# Altium PCB IMX6.PcbDoc (part 3 of 3)
Units mil, origin at the board's own origin, x right, y up, seen from the top; angles counter-clockwise.
Board outline 7950 x 5550 mil, 4 copper layers (Top Layer, GND, VCC, Bottom Layer), stack 30.634 mil thick; 238 components, 318 nets, 1023 pads, 393 vias.
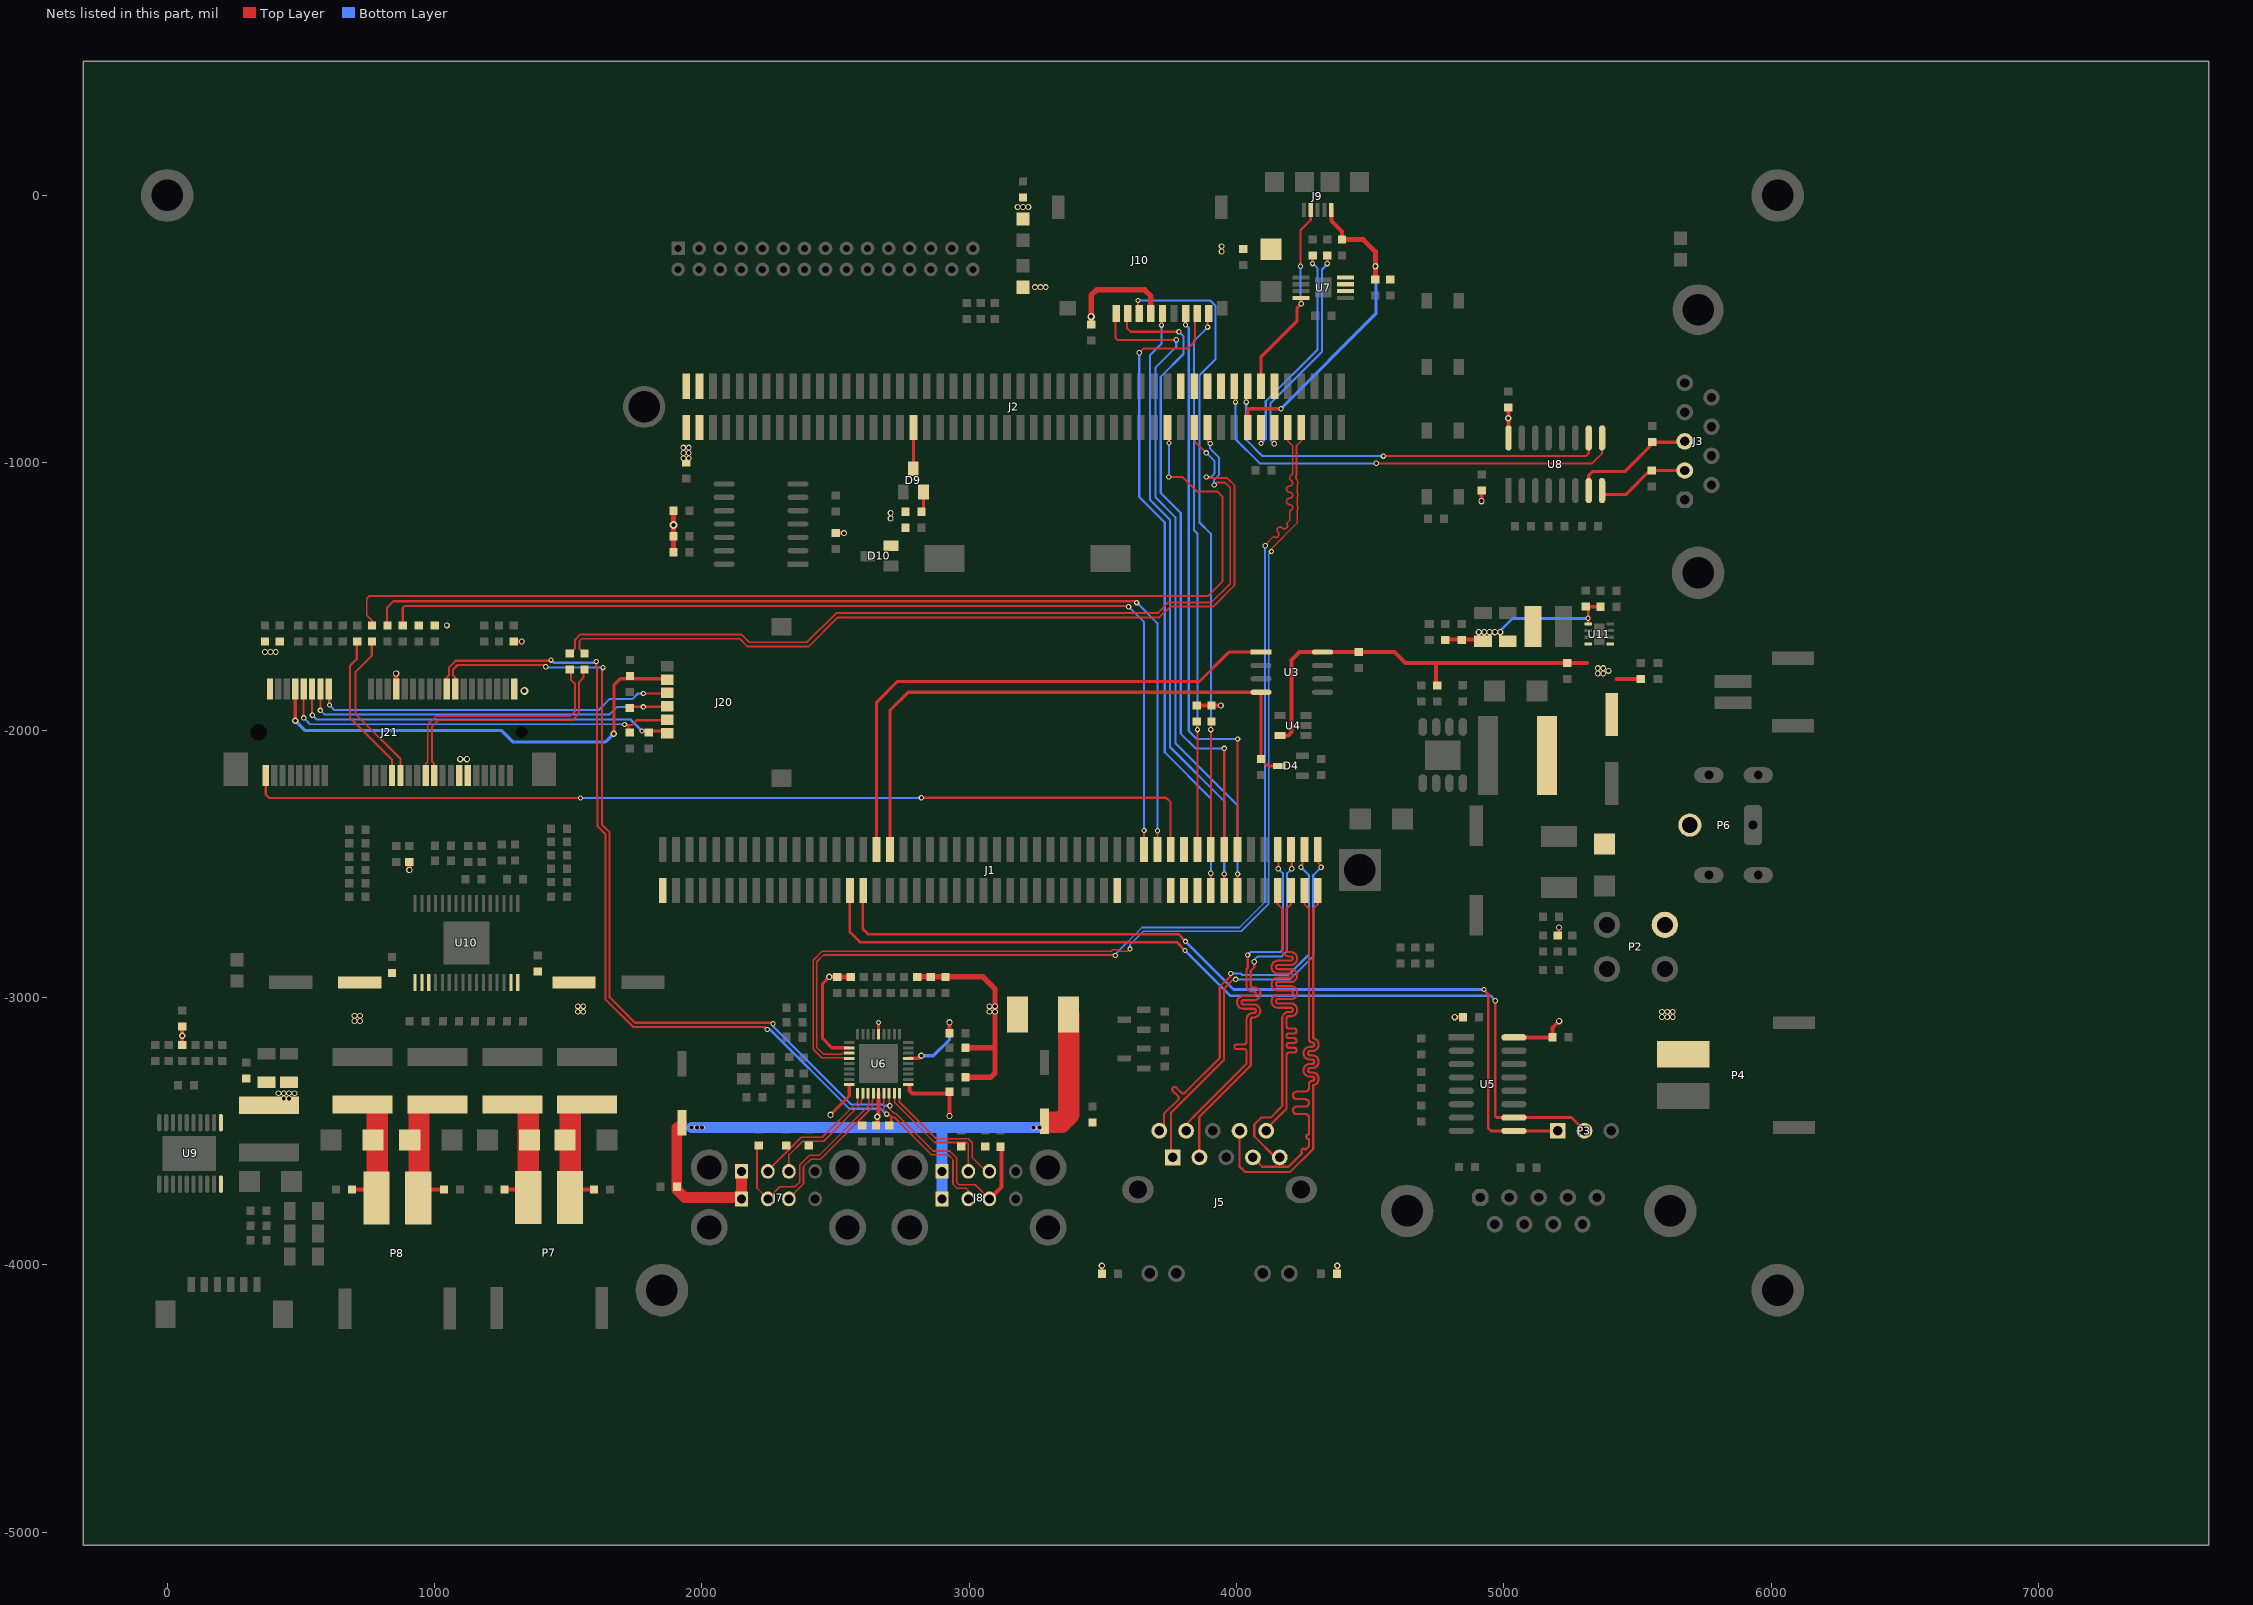
[diagram p5: the nets of this part, all layers, seen from the top]

## Via types
v1: diameter 20, hole 12, Top Layer to Bottom Layer, 140 vias
v2: diameter 24, hole 14, Top Layer to Bottom Layer, 84 vias
v3: diameter 22, hole 14, Top Layer to Bottom Layer, 57 vias
v4: diameter 23, hole 13, Top Layer to Bottom Layer, 38 vias
v5: diameter 22, hole 13, Top Layer to Bottom Layer, 21 vias
v6: diameter 30, hole 22, Top Layer to Bottom Layer, tented top, 15 vias
v7: diameter 22, hole 18, Top Layer to Bottom Layer, 6 vias
v8: diameter 24, hole 13, Top Layer to Bottom Layer, 5 vias
v9: diameter 20, hole 15, Top Layer to Bottom Layer, 5 vias
v10: diameter 18, hole 10, Top Layer to Bottom Layer, 4 vias
v11: diameter 28, hole 16, Top Layer to Bottom Layer, 3 vias
v12: diameter 26, hole 15, Top Layer to Bottom Layer, 3 vias
v13: diameter 22, hole 12, Top Layer to Bottom Layer, 3 vias
v14: diameter 30, hole 15, Top Layer to Bottom Layer, 2 vias
v15: diameter 18, hole 11, Top Layer to Bottom Layer, 2 vias
v16: diameter 28, hole 17, Top Layer to Bottom Layer, 1 vias
v17: diameter 25, hole 15, Top Layer to Bottom Layer, 1 vias
v18: diameter 28, hole 15, Top Layer to Bottom Layer, 1 vias
v19: diameter 18, hole 12, Top Layer to Bottom Layer, 1 vias
v20: diameter 30, hole 16, Top Layer to Bottom Layer, 1 vias

## Nets (pads, with @x,y where several pads share a name; then routed paths per layer and width w, separated by ;. In a path a pad name is that pad's centre, name@x,y a point inside that pad or via, vN(x,y) a via of type N, cw(c..) or ccw(c..) an arc to the next point about the centre after c; other vN are vias at no path point) (continued)
PCIE_RX_P: C117.1 J2.73 | length 4052.9
  Top Layer w7: C117.1@766,-1608 766,-1589 746.5,-1569.5 746.5,-1508 756.5,-1498 3893.63,-1498 3947,-1444.63 3947,-1126.37 3927.63,-1107 3850,-1107 3796,-1053 v1(3746,-1053) ; v1@3747,-927 v1(3747,-926) J2.73@3747,-886
  Bottom Layer w7: v1(3746,-1053) 3746,-1040 3747,-1039 v1(3747,-926)
PCIE_RXO_N: C116.2 J21.23 | length 556
  Top Layer w8: C116.2@709,-1673 709,-1734 684,-1759 684,-1954 841,-2111 J21.23@841,-2152 ; J21.23@841.97,-2169.4 J21.23@842,-2171
PCIE_RXO_P: C117.2 J21.25 | length 577.9
  Top Layer w8: C117.2@765,-1668 765,-1722 704,-1783 704,-1939 873,-2108 J21.25@873,-2149 ; J21.25@872,-2171 J21.25@872.02,-2169.41
PCIE_TX_N: C118.1 J2.79 | length 3293.1
  Top Layer w7: C118.1@1506,-1713 1525.5,-1693.5 1525.5,-1661.37 1544.87,-1642 2147.63,-1642 2176.63,-1671 2393,-1671 2502,-1562 3704.37,-1562 3744.37,-1522 3906,-1522 3976,-1452 3976,-1093 3956,-1073 3926,-1073 v1(3916,-1083) ; J2.79@3891.31,-867.49 3891.31,-918.73 3900.58,-928 v1(3901,-928)
  Bottom Layer w7: v1(3901,-928) 3901,-946.89 3933.84,-979.73 3933.84,-1046.47 3916,-1064.31 v1(3916,-1083)
PCIE_TX_P: C119.1 J2.77 | length 3349.1
  Top Layer w7: C119.1@1561,-1713 1541.5,-1693.5 1541.5,-1668 1551.5,-1658 2141,-1658 2170,-1687 2399.63,-1687 2508.63,-1578 3711,-1578 3751,-1538 3912.63,-1538 3992,-1458.63 3992,-1084 3965,-1057 3890,-1057 v1(3886,-1053) ; J2.77@3841.31,-867.49 3845.31,-871.49 3845.31,-922.31 v1(3886,-963)
  Bottom Layer w7: v1(3886,-1053) 3904.69,-1053 3917.84,-1039.84 3917.84,-994.84 v1(3886,-963)
PCIE_TXO_N: C118.2 J21.31 | length 922.6
  Top Layer w7: J21.31@966.98,-2169.42 966.98,-2126.05 974.73,-2118.3 974.73,-1978.64 1006.37,-1947 1508.37,-1947 1524.69,-1930.69 1524.69,-1825.69 1510,-1811 C118.2@1510,-1778
PCIE_TXO_P: C119.2 J21.33 | length 919.2
  Top Layer w7: J21.33@998.48,-2169.42 998.48,-2126.05 990.73,-2118.3 990.73,-1985.27 1013,-1963 1515,-1963 1540.69,-1937.31 1540.69,-1820.31 1557,-1804 C119.2@1557,-1782
POR_B: D9.3 J2.35 | length 157.5
  Top Layer w12: J2.35@2791.31,-867.49 2791.31,-1018.31 D9.3@2796,-1023
PWM1_OUT: J1.1
RESET_B: D9.2 R93.1 | length 75.3
  Top Layer w12: R93.1@2826,-1183 2828.94,-1180.06 D9.2@2828.94,-1108.95
SATA_RX_N: J2.82
SATA_RX_P: J2.80
SATA_TX_N: J2.76
SATA_TX_P: J2.78
SD2_CD: J1.82 J10.9 R36.1 | length 2061.9
  Top Layer w8: J1.82@3853.52,-2446.23 v1(3853.52,-1998) R36.1@3853.52,-1970.52 ; v1(3891.5,-492.5) J10.9@3891.5,-437.89
  Bottom Layer w8: v1(3853.52,-1998) 3853.52,-1265.52 3841,-1253 3841,-543 v1(3891.5,-492.5)
SD2_CLK: J1.85 J10.5 | length 2295.4
  Top Layer w8: v1(3719,-485) J10.5@3719,-437.17 ; J1.85@3953.52,-2599.77 v1(3953.52,-2538)
  Bottom Layer w8: v1(3719,-485) 3719,-525 3719,-555 3676,-598 3676,-1138 3751,-1213 3751,-2063 3953.52,-2265.52 v1(3953.52,-2538)
SD2_CMD: J1.84 J10.3 R35.1 | length 2447
  Top Layer w8: J10.3@3629,-432.72 3631,-430.72 v1(3631,-393) ; J1.84@3903.52,-2446.23 v1(3903.52,-1998) R35.1@3903.52,-1965.52
  Bottom Layer w8: v1(3631,-393) 3901,-393 3921,-413 3921,-613 3861,-673 3861,-1223 3903.52,-1265.52 v1(3903.52,-1998)
SD2_DATA0: J1.88 J10.7 | length 2180.7
  Top Layer w8: J10.7@3806.14,-436.64 3809,-439.5 v1(3809,-484) ; J1.88@4003.52,-2446.23 v1(4003.52,-2033)
  Bottom Layer w8: v1(3809,-484) 3821,-496 3821,-2003 3851,-2033 v1(4003.52,-2033)
SD2_DATA1: J1.83 J10.8 | length 2438.4
  Top Layer w8: v1(3636,-588) 3651,-573 3816,-573 3844,-545 J10.8@3844,-455 ; J1.83@3903.52,-2599.77 v1(3903.52,-2535.52)
  Bottom Layer w8: v1(3636,-588) 3636,-1128 3731,-1223 3731,-2083 3903.52,-2255.52 v1(3903.52,-2535.52)
SD2_DATA2: J1.87 J10.1 | length 2546
  Top Layer w8: J10.1@3546.3,-436.64 3546.3,-532.3 3554,-540 v1(3774,-540) ; J1.87@4003.52,-2599.77 v1(4003.52,-2538)
  Bottom Layer w8: v1(3774,-540) 3774,-565.87 3696,-643.87 3696,-1128 3771,-1203 3771,-2048 4003.52,-2280.52 v1(4003.52,-2538)
SD2_DATA3: J1.86 J10.2 | length 2399.2
  Top Layer w8: J10.2@3589.61,-436.64 3589.61,-495.61 3604,-510 v1(3784,-510) ; J1.86@3953.52,-2446.23 v1(3953.52,-2068)
  Bottom Layer w8: v1(3784,-510) 3801,-527 3801,-593 3716,-678 3716,-1113 3791,-1188 3791,-2013 3846,-2068 v1(3953.52,-2068)
SD3_CMD: J1.77
SD3_DATA0: J1.80
SD3_DATA1: J1.74 R105.1 | length 3692.2
  Top Layer w8: R105.1@881,-1608 881,-1543 889,-1535 3593,-1535 v1@3600,-1542 ; J1.74@3654,-2415 v1@3654,-2374
  Bottom Layer w8: v1(3596,-1538) 3654,-1596 v1(3654,-2375)
SD3_DATA2: J1.76 R104.1 | length 3799.4
  Top Layer w8: R104.1@822,-1608 822,-1542 846,-1518 v1@3621,-1518 ; J1.76@3704,-2416 v1@3704,-2375
  Bottom Layer w8: v1@3627.5,-1523.5 3703.5,-1599.5 v1@3703.5,-2375.5
  other v1: 3704,-2376 3626,-1523
SD3_DATA4: J1.79
SD3_DATA5: J1.78 J21.1 | length 3615.8
  Top Layer w8: J21.1@368.56,-2182 368.56,-2240.56 381.56,-2253.56 v1(1546,-2253.56) ; J21.1@368.94,-2169.42 J21.1@369,-2163 ; v1(2821,-2253) 3736,-2253 3753,-2270 J1.78@3753,-2424
  Bottom Layer w8: v1(1546,-2253.56) v1@2821,-2253.56
SD3_DATA6: J1.81
SD3_DATA7: J1.69
SPEAK1+: C76.2 D14.K L9.2 P8.1 | length 402
  Top Layer w15: P8.1@974,-3718 C76.2@1036,-3718
  Top Layer w80: P8.1@941.91,-3748 L9.2@941.91,-3408
SPEAK1-: C80.1 D15.K L10.2 P8.2 | length 381
  Top Layer w15: C80.1@691,-3718 P8.2@762,-3718
  Top Layer w80: P8.2@786,-3718 L10.2@786,-3408
SPEAK2+: C70.2 D12.K L7.2 P7.1 | length 372
  Top Layer w15: P7.1@1534,-3718 C70.2@1596,-3718
  Top Layer w80: P7.1@1506.91,-3718 L7.2@1506.91,-3408
SPEAK2-: C72.1 D13.K L8.2 P7.2 | length 368
  Top Layer w15: C72.1@1261,-3718 P7.2@1324,-3718
  Top Layer w80: P7.2@1351,-3718 L8.2@1351,-3413
TRX0_N: J1.100 J5.2 | length 1505.7
  Top Layer w8: J5.2@3754,-3591 3754,-3431.63 3953,-3232.63 3953,-2966.81 3987.81,-2932 v1(3997,-2932) ; J1.100@4306.82,-2446.23 4306.82,-2497.52 4316,-2506.7 v1(4316,-2513)
  Bottom Layer w8: v1(3997,-2932) 4200.13,-2932 4286.5,-2845.63 4286.5,-2542.5 v1(4316,-2513)
TRX0_P: J1.98 J5.1 | length 1456.8
  Top Layer w8: J5.1@3728,-3498 3728,-3435 3781,-3382 ccw(c3774.64,-3375.64) 3781,-3369.27 3761.82,-3350.09 cw(c3768.18,-3343.73) 3761.82,-3337.36 cw(c3768.18,-3343.73) 3774.55,-3337.36 3793.73,-3356.54 ccw(c3800.09,-3350.18) 3806.46,-3356.54 3812,-3351 3937,-3226 3937,-2960.19 3978,-2919.19 v1(3978,-2910) ; v1(4241,-2513) 4241,-2507.68 4246.94,-2501.74 J1.98@4246.94,-2491.42
  Bottom Layer w8: v1(3978,-2910) 4015,-2910 4021,-2916 4193.5,-2916 4270.5,-2839 4270.5,-2542.5 v1(4241,-2513) v1@4240.1,-2513.9
TRX1_N: J1.96 J5.4 | length 1506.9
  Top Layer w8: J5.4@3861,-3598 3860,-3597 3860,-3447 4053,-3254 4053,-3082 cw(c4061,-3082) 4061,-3074 4064.47,-3074 ccw(c4064.47,-3050) 4088.47,-3050 ccw(c4064.47,-3050) 4064.47,-3026 4025.53,-3026 cw(c4025.53,-3018) 4025.53,-3010 4064.47,-3010 ccw(c4064.47,-2986) 4088.47,-2986 ccw(c4064.47,-2986) 4064.47,-2962 4061,-2962 cw(c4061,-2954) 4053,-2954 4053,-2900 4066,-2887 v1(4066,-2866) ; J1.96@4203.52,-2446.23 4206,-2448.71 v1(4206,-2518)
  Bottom Layer w8: v1(4066,-2866) 4066,-2859 4079,-2846 4168.63,-2846 4189,-2825.63 4189,-2535 v1(4206,-2518)
TRX1_P: J1.94 J5.3 | length 1510
  Top Layer w8: J5.3@3811,-3498 3811,-3473.37 3848.69,-3435.69 4022.19,-3262.19 4030.64,-3253.74 4037,-3247.37 4037,-3202 ccw(c4028,-3202) 4028,-3193 4000.59,-3193 cw(c4000.59,-3184) 3991.59,-3184 cw(c4000.59,-3184) 4000.59,-3175 4028,-3175 ccw(c4028,-3166) 4037,-3166 4037,-3157 4037,-3148 4037,-3082 cw(c4061,-3082) 4061,-3058 4064.47,-3058 ccw(c4064.47,-3050) 4072.47,-3050 ccw(c4064.47,-3050) 4064.47,-3042 4025.53,-3042 cw(c4025.53,-3018) 4025.53,-2994 4064.47,-2994 ccw(c4064.47,-2986) 4072.47,-2986 ccw(c4064.47,-2986) 4064.47,-2978 4061,-2978 cw(c4061,-2954) 4037,-2954 4037,-2893.37 4041.69,-2888.69 4041.69,-2841.69 v1(4041,-2841) ; J1.94@4153.52,-2446.23 4156,-2448.71 v1(4156,-2518) v1@4154.05,-2518
  Bottom Layer w8: v1(4041,-2841) 4052,-2830 4162,-2830 4173,-2819 4173,-2535 v1(4156,-2518)
TRX2_N: J1.97 J5.8 | length 1565.5
  Top Layer w8: J5.8@4061,-3598 4096,-3633 4194,-3633 4239,-3588 4244.66,-3582.34 ccw(c4243.95,-3581.64) 4244.66,-3580.93 cw(c4251.02,-3574.57) 4244.66,-3568.2 cw(c4251.02,-3574.57) 4257.38,-3568.2 ccw(c4258.09,-3567.49) 4258.8,-3568.2 4270.52,-3556.48 4270.52,-3547.48 4270.52,-3530.48 ccw(c4269.52,-3530.48) 4269.52,-3529.48 cw(c4269.52,-3520.48) 4260.52,-3520.48 cw(c4269.52,-3520.48) 4269.52,-3511.48 ccw(c4269.52,-3510.48) 4270.52,-3510.48 4270.52,-3486 4270.52,-3450 ccw(c4256.52,-3450) 4256.52,-3436 4224.52,-3436 cw(c4224.52,-3422) 4210.52,-3422 cw(c4224.52,-3422) 4224.52,-3408 4256.52,-3408 ccw(c4256.52,-3394) 4270.52,-3394 ccw(c4256.52,-3394) 4256.52,-3380 4224.52,-3380 cw(c4224.52,-3366) 4210.52,-3366 cw(c4224.52,-3366) 4224.52,-3352 4256.52,-3352 ccw(c4256.52,-3338) 4270.52,-3338 4270.52,-3337 4270.52,-3324 cw(c4282.52,-3324) 4282.52,-3312 ccw(c4282.52,-3304) 4290.52,-3304 ccw(c4282.52,-3304) 4282.52,-3296 4274.52,-3296 cw(c4274.52,-3272) 4274.52,-3248 4282.52,-3248 ccw(c4282.52,-3240) 4290.52,-3240 ccw(c4282.52,-3240) 4282.52,-3232 4274.52,-3232 cw(c4274.52,-3208) 4274.52,-3184 4282.52,-3184 ccw(c4282.52,-3176) 4290.52,-3176 ccw(c4282.52,-3176) 4282.52,-3168 cw(c4282.52,-3156) 4270.52,-3156 4270.52,-2800.6 ; J1.97@4253.52,-2599.77 4253.52,-2651.02 4270.52,-2668.02 4270.52,-2804
TRX2_P: J1.99 J5.7 | length 1549.5
  Top Layer w8: J5.7@4011,-3504 4011,-3632 4031,-3652 4201,-3652 4286.52,-3566.48 4286.52,-3327.66 ccw(c4282.52,-3304) 4306.52,-3304 ccw(c4282.52,-3304) 4282.52,-3280 4274.52,-3280 cw(c4274.52,-3272) 4274.52,-3264 4282.52,-3264 ccw(c4282.52,-3240) 4306.52,-3240 ccw(c4282.52,-3240) 4282.52,-3216 4274.52,-3216 cw(c4274.52,-3208) 4274.52,-3200 4282.52,-3200 ccw(c4282.52,-3176) 4306.52,-3176 ccw(c4282.52,-3176) 4286.52,-3152.34 4286.52,-2800.6 ; 4286.52,-2804 4286.52,-2668.02 4303.52,-2651.02 J1.99@4303.52,-2599.77
TRX3_N: J1.93 J5.10 | length 1558.3
  Top Layer w8: J5.10@4147,-3600 4066,-3519 4066,-3475 4092,-3449 4127,-3449 4170.52,-3405.48 4170.52,-3078 cw(c4194.52,-3078) 4194.52,-3054 4202.41,-3054 ccw(c4202.41,-3046) 4210.41,-3046 ccw(c4202.41,-3046) 4202.41,-3038 4154.63,-3038 cw(c4154.63,-3014) 4154.63,-2990 4202.41,-2990 ccw(c4202.41,-2982) 4210.41,-2982 ccw(c4202.41,-2982) 4202.41,-2974 4154.63,-2974 cw(c4154.63,-2950) 4154.63,-2926 4202.41,-2926 ccw(c4202.41,-2918) 4210.41,-2918 ccw(c4202.41,-2918) 4202.41,-2910 4154.63,-2910 cw(c4154.63,-2886) 4154.63,-2862 4202.41,-2862 ccw(c4202.41,-2854) 4210.41,-2854 ccw(c4202.41,-2854) 4202.41,-2846 4194.52,-2846 cw(c4194.52,-2822) 4170.52,-2822 4170.52,-2668.02 4153.52,-2651.02 J1.93@4153.52,-2599.77
  Bottom Layer w8: J5.10@4161,-3598 J5.10@4166,-3598
TRX3_P: J1.95 J5.9 | length 1564.3
  Top Layer w8: J5.9@4108,-3494 4186.52,-3415.48 4186.52,-3276 4186.52,-3215 cw(c4195.52,-3215) 4195.52,-3206 4215.32,-3206 ccw(c4215.32,-3197) 4224.32,-3197 ccw(c4215.32,-3197) 4215.32,-3188 4195.52,-3188 cw(c4195.52,-3179) 4186.52,-3179 cw(c4195.52,-3179) 4195.52,-3170 4215.32,-3170 ccw(c4215.32,-3161) 4224.32,-3161 ccw(c4215.32,-3161) 4215.32,-3152 4195.52,-3152 cw(c4195.52,-3143) 4186.52,-3143 cw(c4195.52,-3143) 4195.52,-3134 4215.32,-3134 ccw(c4215.32,-3125) 4224.32,-3125 ccw(c4215.32,-3125) 4215.32,-3116 4195.52,-3116 cw(c4195.52,-3107) 4186.52,-3107 4186.52,-3078 cw(c4194.52,-3078) 4194.52,-3070 4202.41,-3070 ccw(c4202.41,-3046) 4226.41,-3046 ccw(c4202.41,-3046) 4202.41,-3022 4154.63,-3022 cw(c4154.63,-3014) 4154.63,-3006 4202.41,-3006 ccw(c4202.41,-2982) 4226.41,-2982 ccw(c4202.41,-2982) 4202.41,-2958 4154.63,-2958 cw(c4154.63,-2950) 4154.63,-2942 4202.41,-2942 ccw(c4202.41,-2918) 4226.41,-2918 ccw(c4202.41,-2918) 4202.41,-2894 4154.63,-2894 cw(c4154.63,-2886) 4154.63,-2878 4202.41,-2878 ccw(c4202.41,-2854) 4226.41,-2854 ccw(c4202.41,-2854) 4202.41,-2830 4194.52,-2830 cw(c4194.52,-2822) 4186.52,-2822 4186.52,-2668.02 4203.52,-2651.02 J1.95@4203.52,-2599.77
  Bottom Layer w8: J5.9@4111,-3499.47 J5.9@4111,-3498
U2_RXD: D18.1 J3.2 U8.8 | length 347.3
  Top Layer w12: U8.8@5366,-1118.83 5455.17,-1118.83 5545.17,-1028.83 J3.2@5676,-1028.83
U2_TXD: D19.1 J3.3 U8.7 | length 462.2
  Top Layer w12: U8.7@5316.91,-1103.76 5316.91,-1047.09 5331,-1033 5451,-1033 5561,-923 J3.3@5671,-923
UART1_RX: J2.84 U8.9 | length 1676.4
  Top Layer w8: J2.84@3991.31,-713.94 3996,-718.63 v1(3996,-773) ; v1(4522,-1002) 5329.61,-1002 5366.91,-964.7 U8.9@5366.91,-906.91
  Bottom Layer w8: v1@3996,-778 3996,-912 4086,-1002 v1(4522,-1002)
UART1_TX: J2.86 U8.10 | length 1565.5
  Top Layer w8: v1(4036,-773) 4036,-719.26 J2.86@4041.31,-713.94 ; v1(4549,-975) 5306.61,-975 5316.91,-964.7 U8.10@5316.91,-906.91
  Bottom Layer w8: v1@4036,-778 4036,-914 4097,-975 v1(4549,-975)
UART2_RX: J1.31 P3.1 U5.9 | length 3294.3
  Top Layer w10: J1.31@2601.52,-2599.77 2601.52,-2743.52 2621,-2763 3782,-2763 v1(3809,-2790) ; v1@4925,-2971 4941,-2987 4941,-3488 4951.91,-3498.91 U5.9@5037.09,-3498.91 ; U5.9@5072.09,-3498.91 P3.1@5188.09,-3498.91
  Bottom Layer w10: v1(3809,-2790) 3989,-2970 v1@4918,-2970
  other v1: 4925,-2970
UART2_TX: J1.29 P3.2 U5.10 | length 3427.7
  Top Layer w10: J1.29@2553.52,-2599.48 2553.52,-2755.52 2591,-2793 3776,-2793 v1(3807,-2824) ; v1@4966.91,-3013 4966.91,-3443.91 4971.91,-3448.91 U5.10@5037.09,-3448.91 ; U5.10@5072.09,-3448.91 5251.91,-3448.91 P3.2@5301,-3498
  Bottom Layer w10: v1(3807,-2824) 3976,-2993 4949,-2993 v1@4967,-3011
  other v1: 4967,-3012
UART3_RX: J1.34 U3.1 | length 2055.9
  Top Layer w12: J1.34@2653.52,-2446.23 2653.52,-1895.48 2731,-1818 3861,-1818 3971,-1708 U3.1@4081,-1708
UART3_TX: D4.3 J1.36 R18.2 U3.4 | length 2265.9
  Top Layer w10: U3.4@4091,-1858 R18.2@4091,-2108 4117.06,-2134.06 D4.3@4159.95,-2134.06
  Top Layer w12: J1.36@2703.52,-2446.23 2703.52,-1925.48 2771,-1858 U3.4@4091,-1858
UIM_CLK: D31.1 J20.6 J21.12 | length 1469
  Top Layer w8: v1@542,-1946 J21.12@542,-1831.36 ; J20.6@1865.44,-2003 J20.6@1870.44,-2008
  Top Layer w10: v1(1776,-2003) J20.6@1865.44,-2003
  Bottom Layer w8: v1@543,-1943 560,-1960 1733,-1960 v1(1776,-2003)
  other v1: 543,-1944
UIM_DATA: D30.2 J20.5 J21.10 | length 1496.7
  Top Layer w8: v1@510,-1957 J21.10@510,-1861.36 ; J21.10@510.02,-1846.58 J21.10@510,-1843 ; v1@1711.17,-1980.17 1738.83,-1980.17 1756,-1963 J20.5@1864,-1963 ; D30.2@1725.09,-2007.91 1725.09,-1981.08
  Bottom Layer w8: v1(511,-1954) 534.25,-1977.29 v1@1712,-1978.37
  other v1: 1711,-1979
UIM_PWR: C1.1 J20.2 J21.8 | length 1753.1
  Top Layer w8: J21.8@477,-1840 J21.8@477.23,-1846.64
  Top Layer w12: v8@479,-1966 J21.8@479,-1842 ; v8@1671,-2005 1671,-1832 1695,-1808 J20.2@1870.44,-1808
  Bottom Layer w12: v8(479,-1965) 515,-2001 1249,-2001 1292,-2044 1639.72,-2044 v8@1672.72,-2011
  other v8: 1671,-2013
UIM_RESET: D32.1 J20.4 J21.14 | length 1470.2
  Top Layer w8: v1@573,-1928 J21.14@573,-1824.36
  Top Layer w10: D32.1@1730.09,-1913 J20.4@1874,-1913
  Bottom Layer w8: v1(573,-1926) 589,-1942 1654,-1942 1683,-1913 v1@1777,-1913
  other v1: 1781,-1913
UIM_VPP: J20.3 J21.16 | length 1356.8
  Top Layer w8: v1@606,-1906 J21.16@606,-1825.36 ; v1(1781,-1863) J20.3@1860,-1863
  Bottom Layer w8: v1@608,-1907 626,-1925 1613,-1925 1655,-1883 1741,-1883 1761,-1863 v1@1772,-1863
  other v1: 607,-1906
USB_H1_D_N: J2.91 U6.30 | length 4163.3
  Top Layer w6: U6.30@2550.76,-3207.72 2527.08,-3207.72 2523.24,-3211.57 2454.37,-3211.57 2430,-3187.2 2430,-2866.17 2455.17,-2841 3536.69,-2841 3540.34,-2837.34 v1(3546,-2843) ; v1(4107,-1310) 4107,-1309 4106,-1308 4138.21,-1275.79 ccw(c4146.34,-1267.66) 4154.47,-1259.53 cw(c4162.6,-1251.4) 4170.74,-1243.26 ccw(c4178.87,-1235.13) 4187,-1227 4198,-1216 4198,-1179 ccw(c4198,-1167.5) 4198,-1156 cw(c4198,-1144.5) 4198,-1133 ccw(c4198,-1121.5) 4198,-1110 cw(c4198,-1098.5) 4198,-1087 ccw(c4198,-1075.5) 4198,-1064 4198,-1053 4210,-1041 4210,-937.42 4191.31,-918.73 J2.91@4191.31,-867.49
  Bottom Layer w6: v1(3546,-2843) 3546,-2838 3646,-2738 4011,-2738 4106,-2643 v1@4106,-1308
USB_H1_D_P: J2.93 U6.31 | length 4127.2
  Top Layer w6: U6.31@2550.76,-3227.41 2527.08,-3227.41 2525.24,-3225.57 2448.57,-3225.57 2416,-3193 2416,-2860.37 2449.37,-2827 3530.89,-2827 3536.89,-2821 3555.11,-2821 3561.11,-2827 3592,-2827 v1(3601,-2818) ; v1(4130,-1332) 4130,-1321 4226,-1225 4226,-1179.19 4226.31,-1178.88 4226.31,-1178.35 4226.86,-1177.8 4226.86,-1175.97 4227.29,-1175.54 4227.29,-1174.83 4227.41,-1174.7 4227.41,-1173.56 4227.85,-1173.13 4227.85,-1170.21 4228.08,-1169.98 4228.08,-1165.02 4227.85,-1164.79 4227.85,-1161.87 4227.41,-1161.44 4227.41,-1160.3 4227.29,-1160.17 4227.29,-1159.46 4226.86,-1159.03 4226.86,-1157.2 4226.31,-1156.65 4226.31,-1156.12 4226,-1155.81 4226,-1133.19 4226.31,-1132.88 4226.31,-1132.35 4226.86,-1131.8 4226.86,-1129.97 4227.29,-1129.54 4227.29,-1128.83 4227.41,-1128.7 4227.41,-1127.56 4227.85,-1127.13 4227.85,-1124.21 4228.08,-1123.98 4228.08,-1119.02 4227.85,-1118.79 4227.85,-1115.87 4227.41,-1115.44 4227.41,-1114.3 4227.29,-1114.17 4227.29,-1113.46 4226.86,-1113.03 4226.86,-1111.2 4226.31,-1110.65 4226.31,-1110.12 4226,-1109.81 4226,-1087.19 4226.31,-1086.88 4226.31,-1086.35 4226.86,-1085.8 4226.86,-1083.97 4227.29,-1083.54 4227.29,-1082.83 4227.41,-1082.7 4227.41,-1081.56 4227.85,-1081.13 4227.85,-1078.21 4228.08,-1077.98 4228.08,-1073.02 4227.85,-1072.79 4227.85,-1069.87 4227.41,-1069.44 4227.41,-1068.3 4227.29,-1068.17 4227.29,-1067.46 4226.86,-1067.03 4226.86,-1065.2 4226.31,-1064.65 4226.31,-1064.12 4222,-1059.81 4222,-1048.8 4224,-1046.8 4224,-936.05 4241.31,-918.73 J2.93@4241.31,-867.49
  Bottom Layer w6: v1(3601,-2818) 3601,-2802.8 3651.8,-2752 4016.8,-2752 4120,-2648.8 4120,-1342 v1(4130,-1332)
USB_H1_OC: J2.90
USB_OTG_D_N: J2.89 R33.2 | length 849.3
  Top Layer w8: v1(4141,-928.51) J2.89@4141,-878 ; v1(4339,-255) R33.2@4339,-225
  Bottom Layer w8: v1(4141,-928.51) 4126,-913.51 4126,-778 4319,-585 4319,-277 v1@4341,-255
USB_OTG_D_P: J2.87 R34.2 | length 848.4
  Top Layer w8: v1@4091,-928.51 J2.87@4091,-878 ; v1(4284,-255) R34.2@4284,-225
  Bottom Layer w8: v1(4091,-928) 4109,-910 4109,-770 4303,-576 4303,-272 v1@4286,-255
USB_OTG_ID: J2.88 J9.4 U7.4 | length 756.9
  Top Layer w8: v1(4239,-265) 4239,-130 4277.23,-91.77 J9.4@4277.23,-54.33
  Top Layer w12: J2.88@4091.31,-713.94 4091.31,-603.31 4226,-468.63 4226,-420.32 v1(4241.32,-405) U7.4@4241.32,-383.39
  Bottom Layer w8: v1@4239,-402.68 v1(4239,-265)
USB_OTG_VBUS: C47.2 C48.2 C49.2 J2.85 J9.1 U7.6 U7.7 U7.8 | length 1232.4
  Top Layer w12: J2.85@4041.31,-867.49 4041.31,-802.69 4046,-798 v1(4166,-798)
  Top Layer w15: J9.1@4354,-54.33 4354,-95 4394,-135 C47.2@4394,-165
  Top Layer w18: C47.2@4394,-165 4474,-165 4519,-210 v4(4519,-265) 4519,-300
  Bottom Layer w12: v1(4166,-798) 4521,-443 v4@4521,-265
USB_PORT1_N: D22.1 J7.2 U6.1 | length 477.7
  Top Layer w6: J7.2@2246.63,-3649.97 2246.63,-3647.74 2371.37,-3523 2450,-3523 2582.26,-3390.74 U6.1@2582.26,-3357.33
USB_PORT1_P: D24.1 J7.3 U6.2 | length 453.5
  Top Layer w6: J7.3@2325.37,-3649.97 2325.37,-3588.8 2377.17,-3537 2455.8,-3537 2596.26,-3396.54 2596.26,-3384.74 2601.95,-3379.06 U6.2@2601.95,-3357.33 U6.2@2601.77,-3357.5
USB_PORT2_N: D23.2 J7.6 U6.3 | length 814.6
  Top Layer w6: D23.2@2211.91,-3553.09 2206,-3559 2206,-3712.49 J7.6@2246.63,-3753.12 ; J7.6@2254.5,-3744.5 2291,-3708 2348,-3708 2366,-3690 2366,-3626.37 2401.96,-3590.41 2438.06,-3590.41 2623.47,-3405 2623.47,-3382.86 2621.63,-3381.02 U6.3@2621.63,-3357.33
USB_PORT2_P: D25.2 J7.7 U6.4 | length 564.3
  Top Layer w6: J7.7@2313.81,-3764.81 2313.81,-3762.19 2375,-3701 2375,-3700.8 2380,-3695.8 2380,-3632.17 2407.76,-3604.41 2443.86,-3604.41 2637.47,-3410.8 2637.47,-3384.86 2641.32,-3381.02 U6.4@2641.32,-3357.33
USB_PORT3_N: D27.2 J8.6 J21.36 U6.6 | length 3793.8
  Top Layer w6: U6.6@2680.68,-3357.33 2680.68,-3419.68 2691,-3430 v1(2691,-3436) 2697,-3436 2708,-3447 2712.44,-3447 2713.68,-3448.24 2719.24,-3448.24 2859,-3588 2921,-3588 2939,-3606 2939,-3697.63 2955.37,-3714 2989,-3714 2996.63,-3721.63 J8.6@2996.63,-3753.12
  Top Layer w8: J21.36@1045.73,-1846.58 1045.73,-1803.21 1053.47,-1795.46 1053.47,-1766.37 1079.36,-1740.49 v1@1435.49,-1740.49 ; v1@1435.49,-1743 v1(1435.49,-1738) ; v1(1605,-1743) 1605,-1759.37 1608,-1762.37 1608,-2246 1610,-2248 1610,-2359.63 1638.81,-2388.44 1638.81,-3005.81 1743.19,-3110.19 2235.56,-3110.19 v1(2244.69,-3119.31) ; D27.2@2700.09,-3477.91 D27.2@2708,-3470.01
  Top Layer w10: D27.2@2708,-3470.01 2708,-3447
  Bottom Layer w8: v1(1435.49,-1738) 1445.49,-1748 v1@1604,-1748 ; v1(2244.69,-3119.31) 2254.69,-3119.31 2551.37,-3416 2668.37,-3416 2684.37,-3432 v1@2694,-3432 ; v1(2691,-3436) 2692,-3436 v1@2695,-3433
USB_PORT3_P: D29.2 J8.7 J21.38 U6.7 | length 3944.7
  Top Layer w6: U6.7@2700.37,-3357.33 2700.37,-3415.09 2718.24,-3433 2723.8,-3433 2864.8,-3574 2926.8,-3574 2953,-3600.2 2953,-3691.83 2961.17,-3700 3022.25,-3700 J8.7@3075.37,-3753.12
  Top Layer w8: J21.38@1077.22,-1846.58 1077.22,-1803.21 1069.47,-1795.46 1069.47,-1773 1085.98,-1756.49 1411.49,-1756.49 1416,-1761 v1(1416,-1763) ; v1(1630,-1766) 1626,-1770 1626,-2353 1654.81,-2381.81 1654.81,-2999.19 1749.81,-3094.19 2263.19,-3094.19 v1@2266.5,-3097.5 ; v1(2266,-3098) v1@2267,-3098 ; J8.7@3075.37,-3753.12 J8.7@3075.88,-3753.12
  Top Layer w15: J8.7@3075.88,-3753.12 3121,-3708 D29.2@3121,-3568
  Bottom Layer w8: v1@1422,-1766 v1(1630,-1766) ; v1(2266,-3098) 2266,-3108 2558,-3400 2675,-3400 2682,-3407 2684,-3405 v1(2703,-3405)
USB_PORT4_N: D26.1 J8.2 U6.8 | length 477.3
  Top Layer w6: U6.8@2720.05,-3357.33 2720.05,-3381.02 2721.9,-3382.86 2721.9,-3393.63 2870.27,-3542 2990,-3542 2996.63,-3548.63 J8.2@2996.63,-3649.97
USB_PORT4_P: D28.1 J8.3 U6.9 | length 505.2
  Top Layer w6: U6.9@2739.74,-3357.33 2739.74,-3381.02 2737.9,-3382.86 2737.9,-3389.83 2876.07,-3528 2995.8,-3528 3010.63,-3542.83 3010.63,-3598.63 3063,-3651 J8.3@3069,-3651
VBUS: C29.1 C30.2 C36.1 C37.2 F2.2 J7.1 J7.5 J8.1 J8.5 | length 2626.3
  Top Layer w35: 1906,-3488 C36.1@1926,-3468
  Top Layer w40: 1906,-3488 1906,-3718 1936,-3748 2143.09,-3748 J7.5@2148.2,-3753.12 J7.1@2148.2,-3649.97
  Top Layer w80: 3308,-3466 3343,-3466 3371.94,-3437.06 F2.2@3371.94,-3063
  Bottom Layer w30: J8.5@2898,-3756 J8.5@2898.02,-3753.12
  Bottom Layer w40: v9(1961,-3486) v9(1981,-3486) v9(2001,-3486) v9@3261,-3486 ; J8.5@2898.2,-3747 2898.2,-3491.8
  other v9: 3241,-3487 3262,-3487
VCC3V3: C7.2 C25.2 C32.2 C34.2 C35.2 C40.2 C41.2 C42.2 C43.2 C44.2 C50.2 C86.1 C87.1 C88.1 C109.1 C110.1 C111.1 D10.2 J10.4 J21.2 J21.24 J21.39 J21.41 J21.52 L5.2 L11.2 R8.1 R9.2 R10.2 R11.2 R19.2 R24.1 R35.2 R36.2 R44.2 R57.1 R58.2 R89.1 R90.1 R93.2 R112.2 R113.2 R114.2 R115.2 U5.16 U6.5 U6.10 U6.15 U6.23 U6.29 U6.36 U8.16 U11.5 | length 3227.4
  Top Layer w8: R8.1@5314.66,-1543.34 R8.1@5317,-1541
  Top Layer w10: U11.5@5314.66,-1602.84 R8.1@5314.66,-1543.34
  Top Layer w12: v2(2476,-2923) 2451,-2948 2451,-3153 2486.04,-3188.04 U6.29@2550.76,-3188.04 ; v2(2481,-3439) 2481,-3438 2550.76,-3368.24 U6.36@2550.76,-3325.83 ; U6.23@2661,-3136.86 v19(2661,-3093) ; U6.15@2771.24,-3227.41 2811.59,-3227.41 v2(2821,-3218) ; R10.2@3496,-4033 v2(3496,-4003) ; R11.2@4376,-4033 v2(4376,-4003) ; R8.1@5306,-1538 R58.2@5359,-1538
  Top Layer w15: R44.2@56,-3178 C32.2@56,-3108 ; C43.2@1296,-1668 v3@1331,-1668 ; R112.2@2501,-1263 v3(2531,-1263) ; C41.2@2651,-3478 2656,-3473 v2(2656,-3446) 2661,-3441 U6.5@2661,-3357.33 ; 2776,-3333 2776,-3348 2787.38,-3359.38 2919.62,-3359.38 C42.2@2926,-3353 v2(2926,-3443) ; C109.1@2926,-3133 v2(2926,-3093) ; R36.2@3856,-1908 v3(3941,-1908) ; R9.2@4781,-1661 C86.1@4909,-1661 ; v2(4816,-3073) C25.2@4846,-3073 ; v2(4916,-1143) C7.2@4916,-1103 ; U8.16@5016.91,-906.91 C35.2@5016.91,-793.91 ; U5.16@5037.09,-3148.91 C34.2@5180.09,-3148.91 ; C34.2@5181,-3148 5181,-3113 v2(5206,-3088)
  Top Layer w20: v2(856,-1788) 856,-1845.83 J21.24@856.75,-1846.58 ; v2(906,-2523) R57.1@906,-2493 ; R113.2@1894,-1333 R115.2@1894,-1179 ; v2(2476,-2923) R19.2@2506,-2923 R24.1@2556,-2923 ; C110.1@3456,-483 3456,-373 3476,-353 3656,-353 3679.22,-376.22 J10.4@3679.22,-441.64
  Bottom Layer w10: v2@4983.5,-1630.5 5032,-1582 v1@5315,-1582
  Bottom Layer w12: v2(2821,-3218) 2866.04,-3218 2926,-3158.04 v2(2926,-3093)
  other v1: 5314,-1581
  other v2: 56,-3143 1096,-2108 1121,-2108 4906,-1633 4926,-1633 4946,-1633 4966,-1633 4986,-1633 5016,-833
  other v3: 366,-1708 386,-1708 406,-1708 1326,-1668 1046,-1608 2706,-1208 2706,-1188 3181,-43 3201,-43 3221,-43
  other v14: 1894,-1233
  other v18: 3456,-453
  other v20: 1336,-1853
VCC5V: C2.1 C5.1 C17.1 C18.1 C21.1 C23.1 D6.A F2.1 J2.1 J2.2 J2.3 J2.4 L1.2 L4.1 R2.1 R3.1 R17.1 R20.1 R21.1 R22.1 R23.1 U3.8 U4.5 U11.1 U11.8 | length 2485.8
  Top Layer w12: R17.1@5206,-2768 v3(5206,-2738)
  Top Layer w15: 3095.96,-3188.04 3096,-3188 ; U4.5@4162.77,-2020.4 4193.28,-2020.4 4206,-2007.69 4206,-1738 4236,-1708 U3.8@4321.31,-1708 4591,-1708 4631,-1748 5311,-1748 ; R2.1@4746,-1832 4746,-1753 ; 5421,-1808 R3.1@5511,-1808
  Top Layer w20: R23.1@2806.04,-2922.68 3050.68,-2922.68 3096,-2968 3096,-3188 3096,-3283 3080.96,-3298.04 R20.1@2986,-3298 ; 3001.32,-3188.04 3095.96,-3188.04
  other v3: 3076,-3053 3096,-3053 3076,-3033 3096,-3033 5351,-1788 5371,-1788 5391,-1778 5351,-1768 5371,-1768 1931,-983 1951,-983 1931,-963 1951,-963 3246,-343 3266,-343 3286,-343 3944,-210 3944,-190
  other v5: 1931,-943 1951,-943
VIN: C57.1 C58.2 C59.2 C65.1 C66.1 C83.1 C84.1 D2.A L6.1 P2.4 P4.1 P6.2 U9.1 U9.20 U10.17 U10.18 U10.19 U10.31 U10.32
  other v3: 436,-3378 456,-3378 416,-3358 436,-3358 456,-3358 476,-3358 701,-3088 721,-3088 5591,-3073 5611,-3073 5631,-3073 701,-3068 721,-3068 1536,-3053 1556,-3053 5591,-3053 5611,-3053 5631,-3053 1536,-3033 1556,-3033
pads on no net: D4.2 D9.1 J3.1 J3.4 J3.6 J3.7 J3.8 J3.9 J6.1 J6.4 J6.6 J6.7 J6.8 J6.9 J9.0 J20. J21.3 J21.5 J21.7 J21.17 J21.19 J21.42 J21.44 J21.45 J21.46 J21.47 J21.49 J21.51 J21.53 J21.54 J21.55 J21.56 U1.2 U1.3 U1.5 U4.1 U5.11 U5.12 U5.13 U5.14 U6.12 U6.16 U6.18 U6.20 U7.9 U8.11 U8.12 U8.13 U8.14 U9.5 U9.8 U9.19 U10.16 U25.1 U25.3 U25.4 U25.7 U25.8 U25.9 U25.14

## Polygon pours and split planes (outlines as drawn)
GND on Top Layer "GND_L01_P042" (solid, remove dead copper, pour order 42): 4391,-2698 4391,-3578 4391,-3798 6431,-3798 6431,-2718
EARTH on Top Layer "EARTH_L01_P040" (solid, remove dead copper, pour order 40): 5531,-3658 6171,-3658 6171,-4198 6111,-4258 5491,-4258 5491,-3658
GND on Top Layer "GND_L01_P036" (solid, remove dead copper, pour order 36): 4166,-1508 6366,-1508 6371,-1513 6361,-1523 6361,-2783 4166,-2783
EARTH on Top Layer "EARTH_L01_P026" (solid, remove dead copper, pour order 26): 2471,-3618 2471,-4258 2891,-4258 3271,-4258 3271,-3998 2871,-3998 2871,-3818 2851,-3778 2851,-3758 2851,-3618
EARTH on Top Layer "EARTH_L01_P022" (solid, remove dead copper, pour order 22): 3231,-3578 3231,-4258 3451,-4258 3451,-3578
EARTH on Top Layer "EARTH_L01_P016" (solid, remove dead copper, pour order 16): 5491,-3958 5491,-4258 4491,-4258 4491,-3938 4491,-3678 4811,-3678 4811,-3958 4831,-3978 5531,-3978
EARTH on Top Layer "EARTH_L01_P010" (solid, remove dead copper, pour order 10): 6031,-1498 6031,-3658 6051,-3678 6171,-3678 6171,-1498 6151,-1478
EARTH on Top Layer "EARTH_L01_P006" (solid, remove dead copper, pour order 6): 5611,-298 6171,-298 6171,-1518 5649.33,-1518 5609.33,-1478 5611,-1476.33 5611,-1258 5871,-1258 5891,-1238 5891,-618 5651,-618 5611,-578 5611,-298
VIN on Top Layer "Top Layer-No Net 1" (solid, remove dead copper, pour order 0): 5681,-2658 5941,-2658 5941,-3268 5941,-3288 5551,-3288 5551,-2998 5577,-2978 5733,-2978 5733,-2797.47 5759,-2777.47
VIN on Top Layer "Top Layer-No Net 1" (solid, remove dead copper, pour order 2): 5481,-2298 5481,-2818 5711,-2818 5711,-2598 5691,-2578 5681,-2578 5681,-2478 5731,-2428 5751,-2408 5751,-2298
AUGND on GND (split plane): 1826.92,-2398.96 1826.92,-3619.24 1677.24,-3768.92 259.76,-3768.92 225.08,-3734.24 225.08,-2906.76 239.76,-2892.08 576,-2892.08 578.35,-2891.77 580.54,-2890.86 582.42,-2889.42 622.42,-2849.42 623.86,-2847.54 624.77,-2845.35 625.08,-2843 625.08,-2376.76 664.76,-2337.08 1765.04,-2337.08
GND on GND (split plane): 7615.9,-5027.9 -293.9,-5027.9 -293.9,481.9 7615.9,481.9
VCC5V on VCC (split plane): 5486.92,-356.76 5486.92,-1688 5486.92,-1698 5486.92,-1859.24 5294.58,-2051.58 5293.14,-2053.46 5292.23,-2055.65 5291.92,-2058 5291.92,-2918 5291.92,-2954.24 5232.24,-3013.92 4781,-3013.92 4778.65,-3014.23 4776.46,-3015.14 4774.58,-3016.58 4707.24,-3083.92 3039.76,-3083.92 3015.08,-3059.24 3015.08,-2896.76 3034.76,-2877.08 5086,-2877.08 5088.35,-2876.77 5090.54,-2875.86 5092.42,-2874.42 5167.42,-2799.42 5168.86,-2797.54 5169.13,-2796.9 5169.77,-2795.35 5170.08,-2793 5170.08,-383 5169.77,-380.65 5168.86,-378.46 5167.42,-376.58 5037.42,-246.58 5035.54,-245.14 5033.35,-244.23 5031,-243.92 3401,-243.92 3398.65,-244.23 3396.46,-245.14 3394.58,-246.58 3324.58,-316.58 3323.14,-318.46 3322.23,-320.65 3321.92,-323 3321.92,-614.24 3207.24,-728.92 2051,-728.92 2048.65,-729.23 2048.01,-729.5 2046.46,-730.14 2044.58,-731.58 2024.58,-751.58 2023.14,-753.46 2022.23,-755.65 2021.92,-758 2021.92,-1004.24 2007.24,-1018.92 1914.76,-1018.92 1900.08,-1004.24 1900.08,-686.76 1989.76,-597.08 3061,-597.08 3063.35,-596.77 3065.54,-595.86 3067.42,-594.42 3142.42,-519.42 3143.86,-517.54 3144.13,-516.9 3144.77,-515.35 3145.08,-513 3145.08,-383 3145.08,-196.76 3234.76,-107.08 5237.24,-107.08
VIN on VCC (split plane): 2579.58,-3139.42 2581.46,-3140.86 2582.56,-3141.32 2583.65,-3141.77 2586,-3142.08 5291,-3142.08 5293.35,-3141.77 5295.54,-3140.86 5297.42,-3139.42 5422.62,-3014.22 5684.38,-3014.22 5731.92,-3061.76 5731.92,-3259.24 5689.58,-3301.58 5555.24,-3435.92 3019.76,-3435.92 2988.42,-3404.58 2986.54,-3403.14 2984.35,-3402.23 2982,-3401.92 602,-3401.92 599.65,-3402.23 597.46,-3403.14 595.58,-3404.58 558.24,-3441.92 420.76,-3441.92 380.08,-3401.24 380.08,-3023.69 431.69,-2972.08 2412.24,-2972.08
VCC3V3 on VCC (split plane): 7615.9,-5027.9 -293.9,-5027.9 -293.9,481.9 7615.9,481.9

## Keep-outs
Keep-Out Layer:
  lines w8: -139,-4208 ccw(c-69,-4208) -69,-4278 6111,-4278 ccw(c6108.5,-4200.5) 6186,-4198 6186,67 ccw(c6116,67) 6116,137 -74,137 ccw(c-74,72) -139,72 -139,-4208

## Other copper
Top Layer:
  rectangle net EARTH: 616,-4208 2571,-4048
  rectangle net EARTH: -49,-4258 2536,-4163
  rectangle net EARTH: 3841,-4208 3961,-3813
  rectangle net EARTH: 3616,-3908 3961,-3793
  rectangle net EARTH: 3581,-3913 3686,-3678
  rectangle net EARTH: 4181,-3968 4531,-3833
  rectangle net EARTH: 4181,-3938 4311,-3673
  rectangle net GND: 5351,-3018 5416,-2818
  rectangle net GND: 5301,-2933 5486,-2863
  rectangle net GND: 5546,-3403 5831,-3338
  rectangle net GND: 5621,-3493 5726,-3368
  rectangle net EARTH: 5491,-3918 5831,-3658
  rectangle net GND: 5106,-1913.05 5146,-1793
  rectangle net GND: 5061,-1873 5201,-1833
  rectangle net GND: 5881,-1918 5991,-1878
  rectangle net GND: 5911,-2248 5981,-2088
  rectangle net GND: 5916,-2598 5996,-2483
  rectangle net GND: 5741,-2598 5791,-2468
  rectangle net GND: 5901,-2488 5961,-2243
  rectangle net GND: 5861,-2408 5991,-2303
  rectangle net GND: 4676,-2133 4771,-2053
  rectangle net GND: 5613,-190 5723,-82
  rectangle net EARTH: 5610,-325 5720,-210
  rectangle net GND: 5731,-2253 5836,-1873
  rectangle net GND: 5366,-2258 5836,-2113
  rectangle net GND: 5371,-1658 5441,-1618
  rectangle net GND: 5046,-953 5091,-728
  rectangle net GND: 4876,-758 5091,-683
  rectangle net GND: 4806,-918 4896,-348
  rectangle net GND: 3961,-78 4256,-33
  rectangle net GND: 3111,-3408 3216,-3338
  rectangle net GND: 3141,-3408 3226,-3283
  rectangle net GND: 3141,-3293 3301,-3193
  rectangle net GND: 2966,-3513 3136,-3338
  rectangle net GND: 2086,-3253 2186,-3193
  rectangle net GND: 1886,-3303 2091,-3163
  rectangle net GND: 2266,-3393 2346,-3348
  rectangle net GND: 2206,-3393 2281,-3293
  rectangle net GND: 2311,-3478 2351,-3328
  rectangle net GND: 2196,-3508 2421,-3458
  rectangle net GND: 2621,-3593 2681,-3523
  rectangle net GND: 2581,-3553 2716,-3518
  rectangle net AUGND: 1701,-2953 1766,-2873
  rectangle net GND: 541,-4003 663,-3762.57
  rectangle net GND: 136,-3158 196,-3083
  rectangle net GND: 136,-3203 286,-3138
  rectangle net GND: 271,-3263 493.4,-3138
  rectangle net GND: 1711,-2088 1825.53,-2048
  rectangle net GND: 1711,-1768 1896,-1718
  rectangle net GND: 591,-2188 636,-2153
  rectangle net GND: 1021,-2208 1071,-2093
  rectangle net GND: 892,-2208 948,-1920
  rectangle net VCC3V3: 1081,-2208 1136,-2093
  rectangle net VCC3V3: 921,-1631 1076,-1583
  rectangle net VCC3V3: 331,-1898 396,-1758
  rectangle net VCC3V3: 331,-1763 446,-1643
  rectangle net VCC3V3: 1296,-1873 1361,-1833
  rectangle net VCC3V3: 2676,-1333 2786,-1163
  rectangle net VCC5V: 3171,-373 3301,-313
  rectangle net NetC52_1: 2971,-423 3126,-283
  rectangle net NetC52_1: 3036,-293 3241,-173
  rectangle net NetC52_1: 2981,-303 3056,-168
  rectangle net VCC3V3: 3151,-98 3251,2
  rectangle net VCC3V3: 3166,-118 3236,12
  rectangle net VBUS: 3316,-3503 3486,-3448
  rectangle net USB_PORT4_P: 3012.63,-3573 3066,-3558
  rectangle net AUGND: 1634,-3739 1702,-3580
  rectangle net AUGND: 1603,-3592 1701,-3476
  rectangle net AUGND: 1072,-3746 1224,-3584
  rectangle net AUGND: 1015,-3600 1246,-3480
  rectangle net AUGND: 950,-2654 1008,-2581
  rectangle net AUGND: 950,-2671 1009,-2627
  rectangle net AUGND: 1677,-2493 1781,-2360
  rectangle net VCC5V: 3924,-225 4149,-175
  rectangle net VCC5V: 1896,-1033 2011,-658
  rectangle net VIN: 641,-3133 781,-2953
  rectangle net VIN: 1486,-3098 1606,-2928
  rectangle net VCC5V: 3051,-3148 3246,-2988
  rectangle net VIN: 276,-3433 496,-3283
  rectangle net VIN: 191,-3493 506,-3368
  rectangle net VIN: 191,-3733 246,-3433
  rectangle net NetP5_5: 262,-4147 303,-4119
  rectangle net NetC60_2: 421,-4015.4 515,-3643
  rectangle net EARTH: 2811,-3798 2851,-3738
  rectangle net EARTH: 3371,-4258 4871,-4098
  rectangle net +12V: 4786,-2348 4891,-2288
  rectangle net VBUS: 3281,-3508 3321,-3423
  rectangle net VBUS: 1881,-3518 2031,-3433
  rectangle net VIN: 5594,-2741 5940,-2622
  rectangle net VCC3V3: 4884,-1696 5144,-1615
  rectangle net NetL11_1: 5240,-1687 5291,-1642
  rectangle net VCC5V: 5383,-1751 5413,-1671
  rectangle net VCC5V: 5299,-1753 5329,-1671
  rectangle net VCC5V: 5291,-2013 5436,-1708
  rectangle net NetC4_1: 4901,-2241 5019,-1805
  rectangle net VCC5V: 5126,-2066 5440,-1942
  rectangle net NetC4_1: 4831,-2234 4970,-2164
  rectangle net +12V: 4764,-2353 4834,-2251
  rectangle net +12V: 4764,-2451 5286,-2311
  rectangle net NetD2_K: 5121,-2644 5435,-2523
  rectangle net VIN: 5327,-2469 5572,-2317
  rectangle net NetD11_A: 276,-3703 341,-3573
  rectangle net USB_OTG_VBUS: 4384,-340 4599,-295
  rectangle net USB_OTG_VBUS: 4389,-360 4429,-305
  rectangle net NetD6_K: 4149,-365 4274,-325
  rectangle net VIN: 631,-2978 986,-2903
  rectangle net VIN: 1286,-2976 1610,-2903
  rectangle net NetR45_2: 1261,-2663 1286,-2638
  region net VIN: 5761,-2798 5691,-2798 5691,-2988 5761,-2988
  rectangle net VIN: 5641.99,-2418 5731,-2360.01
  rectangle net VIN: 5591,-2406.94 5751,-2298
  rectangle net VIN: 5561,-3278 5831,-3118
  rectangle net VIN: 5521,-2788 5701,-2638
  rectangle net VIN: 5686,-2818 5781,-2688
  rectangle net GVDD: 1156,-2663 1186,-2623
  rectangle net GVDD: 1161,-2658 1186,-2558
  rectangle net VBUS: 3229,-3506 3308,-3466
  rectangle net GND: 226,-2883 296,-2788
  rectangle net AUGND: 216,-2973 551,-2908
  rectangle net AUGND: 565.02,-3592.06 661,-3488
  rectangle net AUGND: 601,-3743 656,-3578
  rectangle net GND: 4761,-1233 4856,-1098
Bottom Layer:
  rectangle net EARTH: 1941,-4158 2846,-3808
  rectangle net EARTH: 1936,-4153 2106,-3573
  rectangle net NetP5_6: 64,-3763 91,-3728
  rectangle net NetP5_5: 27,-3763 57,-3728
GND (plane layer: these items are gaps in the copper):
  lines w18: 216,-3738 256,-3778 1681,-3778 1836,-3623 1836,-2395.2 1768.8,-2328 661,-2328 616,-2373 616,-2843 576,-2883 236,-2883 216,-2903 216,-3738
VCC (plane layer: these items are gaps in the copper):
  lines w18: 5496,-1698 5496,-353 5241,-98 3231,-98 3136,-193 3136,-383 3136,-513 3061,-588 1986,-588 1891,-683 1891,-1008 1911,-1028 2011,-1028 2031,-1008 2031,-758 2051,-738 3211,-738 3331,-618 3331,-323 3401,-253 5031,-253 5161,-383 5161,-2793 5086,-2868 3031,-2868 3006,-2893 3006,-3063 3036,-3093 4711,-3093 4781,-3023 5236,-3023 5301,-2958 5301,-2918 5301,-2058 5496,-1863 5496,-1688 ; 371,-3405 417,-3451 562,-3451 602,-3411 2982,-3411 3016,-3445 5559,-3445 5696,-3308 5741,-3263 5741,-3058 5688.14,-3005.14 5418.86,-3005.14 5291,-3133 2586,-3133 2416,-2963 427.93,-2963 371,-3019.93 371,-3405

## Silkscreen, mask and mechanical layers (free items; w line width, h text height)
Top Overlay:
  lines w10: 4441.31,-593.87 1803.52,-593.87 ccw(c1803.52,-731.66) 1665.72,-731.66 1665.72,-2582.06 ccw(c1803.52,-2582.06) 1803.52,-2719.85 4441.31,-2719.85 ccw(c4441.31,-2582.06) 4579.11,-2582.06 4579.11,-731.66 ; 4441.52,-593.87 cw(c4441.52,-731.66) 4579.31,-731.66
  text "OTG" at 4580,-55 h60 r90
  text "LVDS" at 1785,-290 h60 r90
  text "RED" at 2940,-370 h60 r180
  text "COM0" at 5580,-585 h60 r90
  text "MINI-PCIE" at 516,-883 h60
  text "1" at 1855,-920 h78.74
  text "BAT" at 2892,-1636 h60 r90
  text "3.3V" at 4680,-1680 h60 r90
  text "SIM" at 2530,-1800 h60 r270
  text "5V" at 5650,-1810 h60 r90
  text "DC-IN" at 5807,-2119 h60
  text "B" at 5450,-2600 h60 r270
  text "+" at 5575,-2600 h60 r270
  text "1" at 1765,-2645 h78.74
  text "A" at 5580,-2990 h60 r270
  text "KEY" at 5331,-3048 h60
  text "+12V" at 5526,-3268 h60 r90
  text "ETH0" at 4021,-3398 h60
  text "GND" at 5526,-3413 h60 r90
  text "RX" at 5170,-3430 h60
  text "TX" at 5259.72,-3430.07 h60
  text "G" at 5380,-3430 h60
  text "DC-IN" at 5862,-3614 h60
  text "COM1" at 5542,-3640 h60
  text "B-LIGHT" at 71,-4023 h40
  text "L-SPK" at 1121,-4028 h40 r90
  text "R-SPK" at 1691,-4028 h40 r90

## Text inside footprints (layer, text, board x,y; h text height)
J3: Top Overlay "9" at 5746,-619.67 h30 r270; Top Overlay "5" at 5646,-599.67 h30 r270; Top Overlay "1" at 5646,-1199.67 h30 r270; Top Overlay "6" at 5746,-1179.67 h30 r270
J6: Top Overlay "6" at 4869.33,-3818 h30 r180; Top Overlay "1" at 4849.33,-3718 h30 r180; Top Overlay "5" at 5449.33,-3718 h30 r180; Top Overlay "9" at 5429.33,-3818 h30 r180
J21: Top Overlay "1" at 388.24,-2240.28 h40 r90
U3: Top Overlay "1" at 4067.06,-1661.23 h25.59 r270
U5: Top Overlay "1" at 4803.24,-3109.91 h30 r270
U8: Top Overlay "1" at 4977.91,-1140.76 h30
U25: Top Overlay "1" at 2400.58,-1419 h30 r90